# Altium PCB BuckConverter.PcbDoc
Units mm, origin at the board's own origin, x right, y up, seen from the top; angles counter-clockwise.
Board outline 30.86 x 28.19 mm, 2 copper layers (Top Layer, Bottom Layer); 9 components, 6 nets, 22 pads, 4 vias.
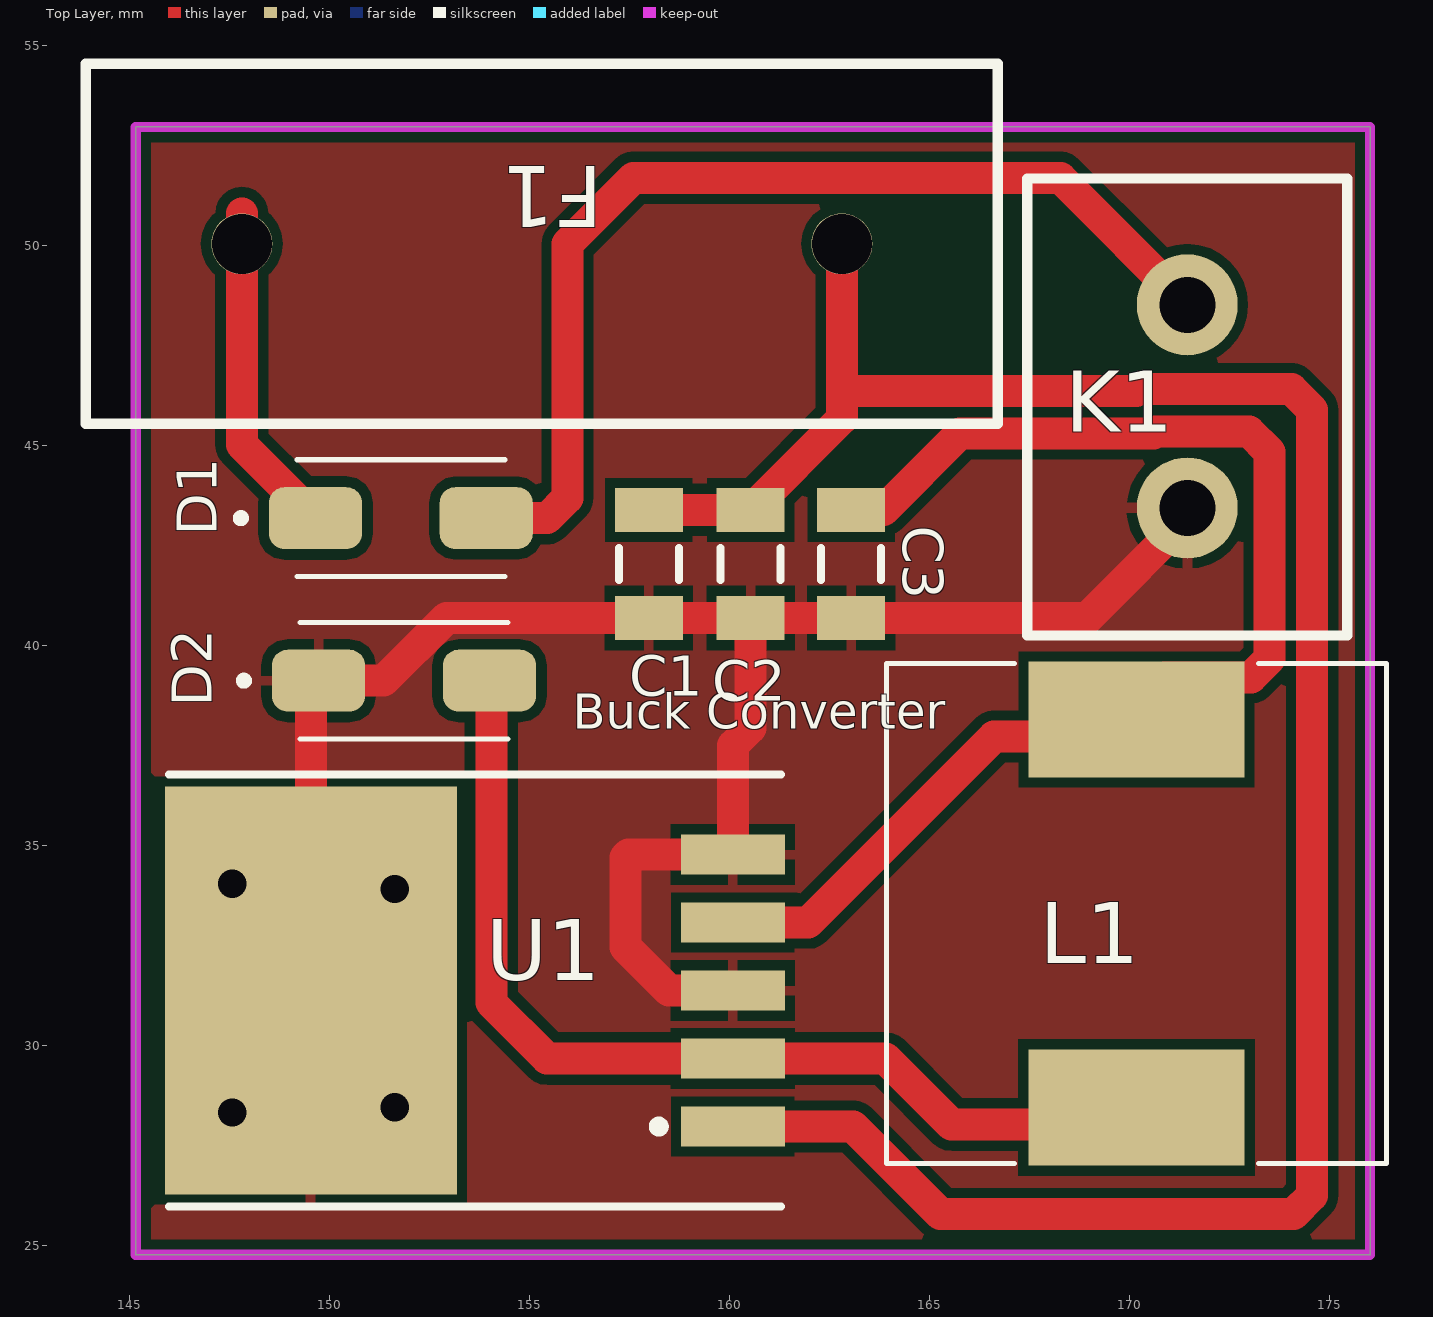
[diagram p0: Top Layer view]
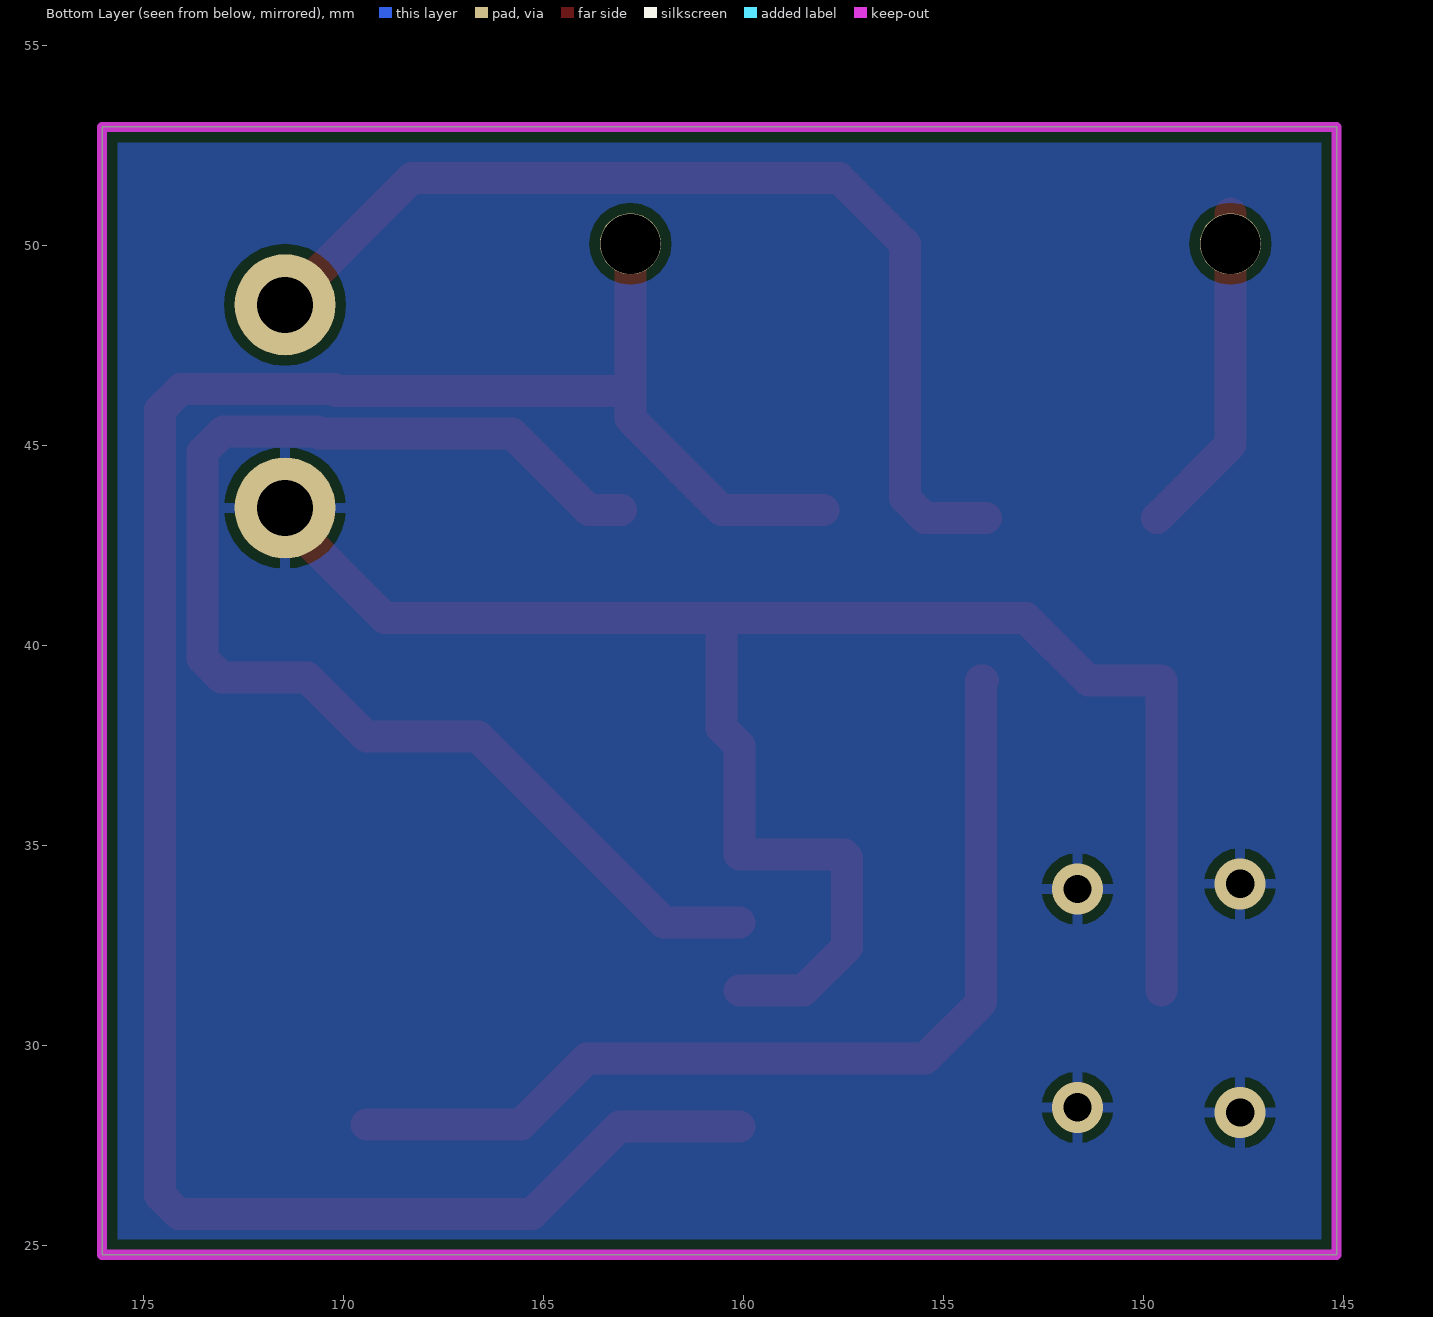
[diagram p1: Bottom Layer view, seen from below]

## Layer stack, top to bottom
Top Solder: solder mask 0.0102, Solder Resist, Dk 3.5
Top Layer: signal copper 0.0356
Dielectric 1: dielectric 0.32, FR-4, Dk 4.8
Bottom Layer: signal copper 0.0356
Bottom Solder: solder mask 0.0102, Solder Resist, Dk 3.5

## Board outline
145.161,24.765 176.022,24.765 176.022,52.959 145.161,52.959

## Design rules (kind name [scope] priority, off if disabled: settings)
Clearance [All] p1: gap=0.254 ignorepadtopadclearanceinfootprint=FALSE except(0: Arc-Hole Track-Hole SMDPad-Hole THPad-Hole Via-Hole Fill-Hole Poly-Hole Region-Hole Text-Hole)
PolygonConnect [All] p1: connectstyle=Relief reliefconductorwidth=0.254 reliefentries=4 polygonreliefangle="90 Angle" airgapwidth=0.254
RoutingVias [All] p1: holewidth=0.711 width=1.27 viastyle="Through Hole" minholewidth=0.711 minwidth=1.27 maxholewidth=0.711 maxwidth=1.27
SolderMaskExpansion [All] p1: expansion=0.102 istentingtop=FALSE
Width [All] p1: maxlimit=2.54 minlimit=0.254 preferedwidth=0.8 minimp=50.000000 maximp=50.000000 favimp=50.000000
30 further rules are at their usual default settings.

## Components (designator, comment, footprint, x,y, rotation, side; value= is the part's Value field where it differs from the comment)
C1 "Cap Semi" C1206 157.988,42.037 r90 top value=47uF
C2 "Cap Semi" C1206 160.535,42.037 r90 top value=47uF
C3 "Cap Semi" C1206 163.048,42.037 r90 top value=47uF
D1 "Diode" Diode 149.63,43.18 r0 top
D2 "Diode" Diode 149.709,39.116 r0 top
F1 "Sigorta_Kutusu" Sigorta_Kutusu 147.819,50.078 r0 top
K1 "Klemens" Klemens 171.45,43.434 r90 top
L1 "Bobin" Bobin 170.18,38.505 r270 top
U1 "LM2575D2T-12" 936A-02 154.813,31.369 r90 top

## Footprints (in the part's own frame and the unit in brackets; to place one, negate y for a bottom-side part, rotate by r counter-clockwise, add the part's x,y. Pads: shape width x height; smd on the part's side, far side on the other; paste and mask are expansions set on the pad)
936A-02 [mm] "D2-PAK; 5 Leads; Body 14.7 (inc. leads) x 10.2 mm (LxW max)"
  rect 1x2.6 smd: 1(-3.4,-5.275) 2(-1.7,-5.275) 3(0,-5.275) 4(1.7,-5.275) 5(3.4,-5.275)
  rect 10.2x7.3 smd: 6(0,5.275)
  silkscreen extent -5.4,-6.48 5.4,8.82
Bobin [mm]
  rect 2.9x5.4 smd: 1(0.357,0) 2(10.057,0)
  silkscreen extent -1.04,-6.25 11.46,6.25
C1206 [mm] "Chip Capacitor, Body 3.2x1.6mm, IPC High Density"
  rect 1.1x1.7 smd: 1(-1.35,0) 2(1.35,0)
  silkscreen extent -0.4,-0.75 0.4,0.75, body extent -1.7,-0.9 1.7,0.9, height 1.3
Diode [mm]
  rrect50% 2.33x1.55 smd: A(4.294,0) C(0.024,0)
  silkscreen extent -1.94,-1.46 4.76,1.46
Klemens [mm]
  round 2.524 hole 1.4: 1(0,0) 2(5.08,0)
  silkscreen extent -3.19,-4 8.24,4
Sigorta_Kutusu [mil]
  round 60 hole 59.06: 1(-0.2,-1.57) 2(590.35,-1.57)
  silkscreen extent -154,-179 744,176

## Part data
C1 C2 C3: "Capacitor (Semiconductor SIM Model)", LatestRevisionDate=29-May-2009, LatestRevisionNote="IPC-7351 Footprint Added.", PackageDescription="Chip Capacitor", PackageReference=C1206, Published=8-Jun-2000, Publisher="Altium Limited"
U1: "Easy Switcher 1.0A Step-Down Voltage Regulator", ComponentLink1Description="Manufacturer Link", ComponentLink1URL=http://www.onsemi.com/site/products/taxonomy/0,4438,503,00.html, ComponentLink2Description=Datasheet, ComponentLink2URL=http://www.onsemi.com/pub/Collateral/LM2575-D.PDF, DatasheetVersion=Jul-1999, Note="Pin 3 is electrically connected to Pin 6;Pin 6 is heatsink", PackageDescription="D2-PAK; 5 Leads; Body 14.7 (inc. leads) x 10.2 mm (LxW max)", PackageReference=936A-02, PackageVersion=Jul-1999, Published=15-Apr-2002, Publisher="Altium Limited"

## Via types
v1: diameter 1.27, hole 0.711, Top Layer to Bottom Layer, 4 vias

## Nets (pads, with @x,y where several pads share a name; then routed paths per layer and width w, separated by ;. In a path a pad name is that pad's centre, name@x,y a point inside that pad or via, vN(x,y) a via of type N, cw(c..) or ccw(c..) an arc to the next point about the centre after c; other vN are vias at no path point)
+5: C3.2 L1.1 U1.4 | length 32.8
  Top Layer w0.8: U1.4 161.974,33.069 166.624,37.719 169.418,37.719 170.897,39.198 173.039,39.198 173.507,39.667 173.507,44.832 172.99,45.35 170.656,45.35 170.607,45.301 165.773,45.301 163.859,43.387 C3.2
+24V: C1.2 C2.2 F1.2 U1.1 | length 57.4
  Top Layer w0.8: C1.2 C2.2 162.814,45.666 162.814,46.355 ; U1.1 163.093,27.969 165.281,25.781 174.106,25.781 174.574,26.25 174.574,45.886 174.057,46.404 170.22,46.404 170.171,46.355 162.814,46.355 ; F1.2 162.814,46.355
GND: C1.1 C2.1 C3.1 D2.C K1.1 U1.3 U1.5 U1.6 | length 45.7
  Top Layer w0.8: U1.6 149.538,39.116 D2.C 151.359,39.116 152.93,40.687 C1.1 C2.1 ; U1.3 158.496,31.369 157.404,32.461 157.404,34.693 157.48,34.769 U1.5 160.088,37.49 160.535,37.937 C2.1 ; K1.1@171.577,43.307 168.957,40.687 C3.1 C2.1
  other v1: 147.574,28.321 151.638,28.448 151.638,33.909 147.574,34.036
NetD1_A: D1.A K1.2 | length 26.3
  Top Layer w0.8: D1.A 155.448,43.18 155.956,43.688 155.956,50.038 157.607,51.689 168.275,51.689 K1.2@171.577,48.387
NetD1_C: D1.C F1.1 | length 8.4
  Top Layer w0.8: 147.814,50.8 147.814,45.02 D1.C
NetD2_A: D2.A L1.2 U1.2 | length 24.7
  Top Layer w0.8: D2.A 154.051,39.116 154.051,31.066 155.448,29.669 U1.2 163.906,29.669 165.556,28.019 L1.2@169.418,28.019

## Polygon pours and split planes (outlines as drawn)
GND on Top Layer "Top Layer-No Net" (solid, remove dead copper, pour order 0): 145.161,24.765 176.022,24.765 176.022,52.959 145.161,52.959
GND on Bottom Layer "GND_L02_P001" (solid, remove dead copper, pour order 1): 145.161,52.324 145.161,52.959 176.022,52.959 176.022,24.892 176.149,24.765 144.874,24.765 145.161,51.943

## Keep-outs
Keep-Out Layer:
  the board outline again, w0.254

## Silkscreen, mask and mechanical layers (free items; w line width, h text height)
Top Overlay:
  text "Buck Converter" at 156.084,37.624 h1.5